# Altium PCB Tactility-pcb.PcbDoc
Units mm, origin at the board's own origin, x right, y up, seen from the top; angles counter-clockwise.
Board outline 100 x 40 mm, 2 copper layers (Top Layer, Bottom Layer), stack 1.581 mm thick; 18 components, 32 nets, 110 pads, 2 vias.
Unrouted connection lines stored in the file: 3.
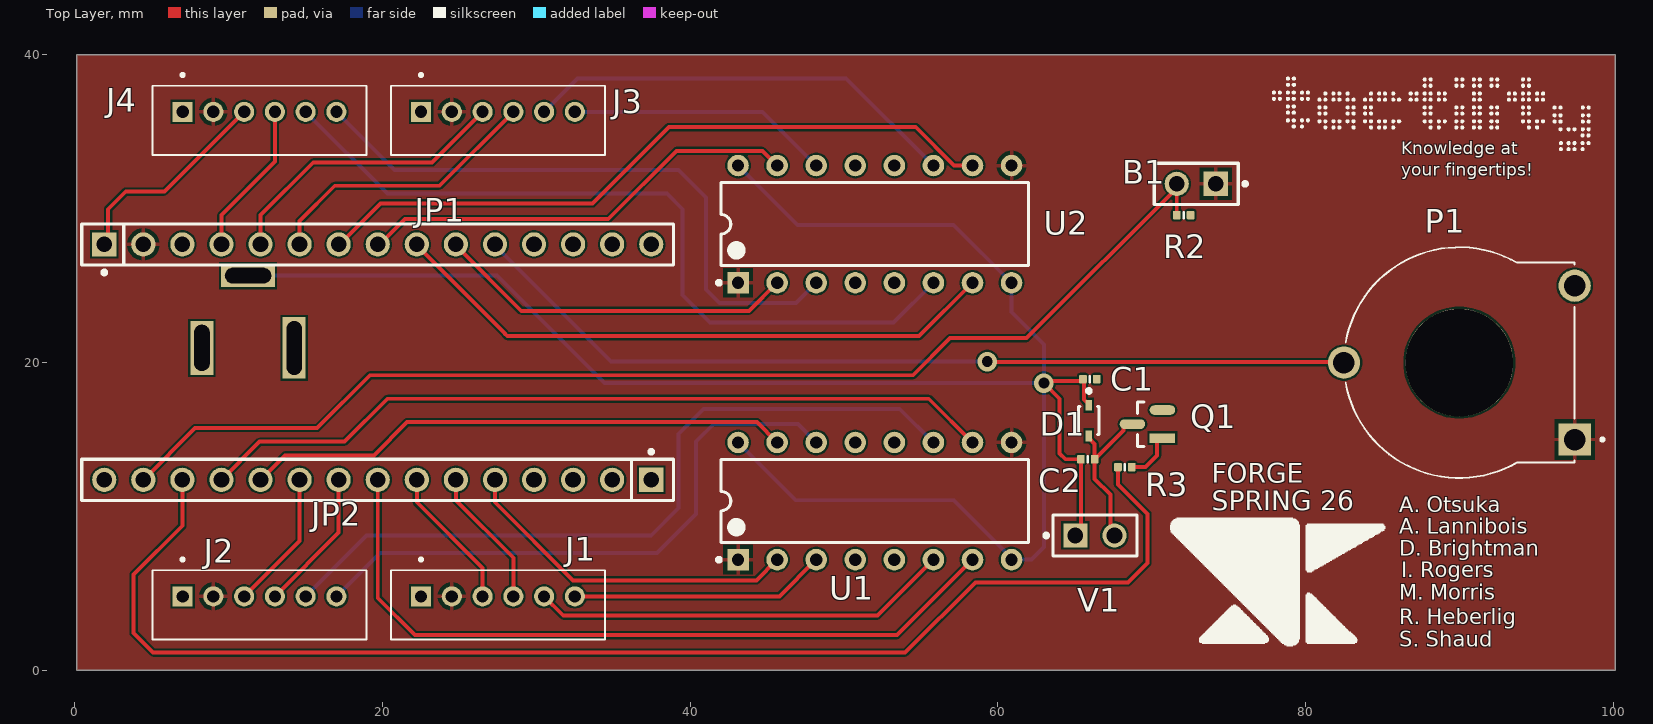
[diagram p0: Top Layer view]
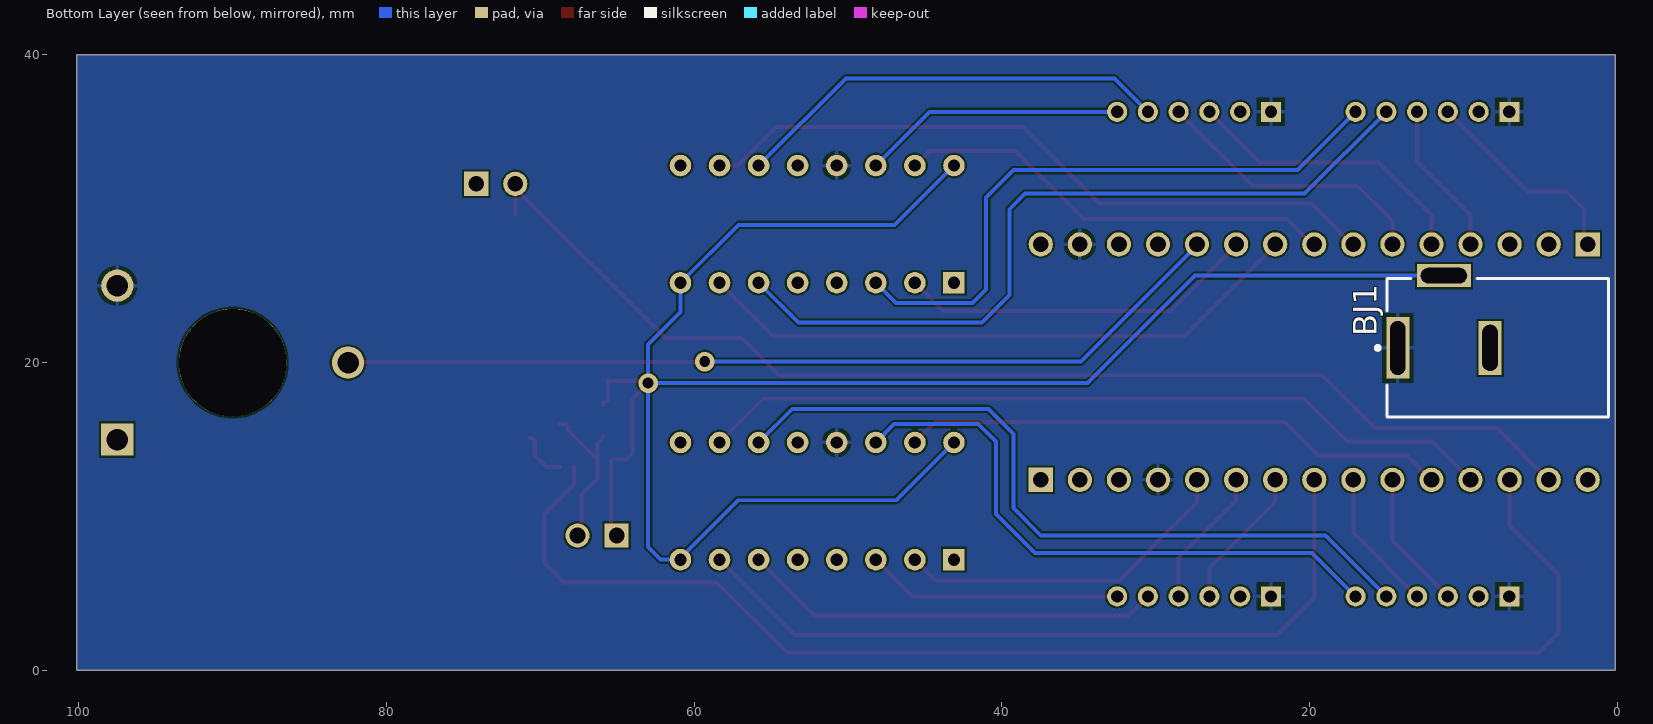
[diagram p1: Bottom Layer view, seen from below]
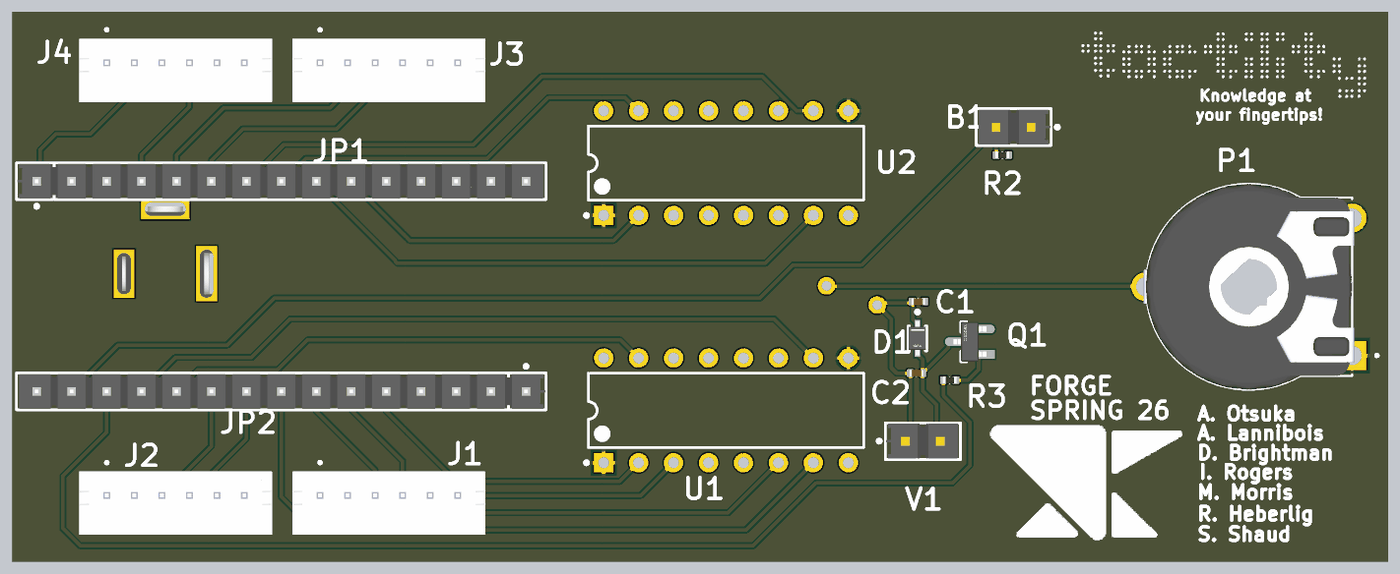
[diagram p2: 3D render of the assembled board from above, using the file's embedded part models]

## Layer stack, top to bottom
Top Solder: solder mask 0.0305, Solder Resist, Dk 3.8
Top Layer: signal copper 0.0356
Dielectric 1: dielectric 1.51, FR-4, Dk 4.6
Bottom Layer: signal copper 0.0356
Bottom Solder: solder mask 0.0305, Solder Resist, Dk 3.8

## Board outline
0.127,0 0.127,40 100.127,40 100.127,0

## Design rules (kind name [scope] priority, off if disabled: settings)
Clearance [All] p1: gap=0.127 ignorepadtopadclearanceinfootprint=FALSE
HoleSize [All] p1: absolutevalues=TRUE maxlimit=7 minlimit=0.025 maxpercent=80.000 minpercent=20.000
MinimumSolderMaskSliver [All] p1: minsoldermaskwidth=0.1
PolygonConnect [All] p1: connectstyle=Relief reliefconductorwidth=0.254 reliefentries=4 polygonreliefangle="90 Angle" airgapwidth=0.254
RoutingVias [All] p1: holewidth=0.3 width=0.6 viastyle="Through Hole" minholewidth=0.3 minwidth=0.6 maxholewidth=0.711 maxwidth=1.27
SilkToSolderMaskClearance [IsPad] p1: minsilkscreentomaskgap=0.1 clearancetoexposedcopper=TRUE
SolderMaskExpansion [All] p1: expansion=0.102 istentingtop=FALSE
SupplyNets "Schematic Supply Nets_2" [InNet('+12')] p1: voltage=0.000
SupplyNets "Schematic Supply Nets_3" [InNet('GND')] p2: voltage=0.000
SupplyNets "Schematic Supply Nets" [InNet('+3V3')] p3: voltage=0.000
Width [All] p1: maxlimit=0.254 minlimit=0.127 preferedwidth=0.254
27 further rules are at their usual default settings.

## Components (designator, comment, footprint, x,y, rotation, side; value= is the part's Value field where it differs from the comment)
B1 "TSW-102-07-F-S" FP-TSW-102-07-F-S-MFG 72.898,31.623 r180 top
BJ1 "PJ-002A" CUI-PJ-002A_V 11.255,20.955 r180 bottom
C1 "Capacitor 100nF +/-20% 10V 0402" CAPC0402(1005)60_L 65.982,18.923 r0 top value=100nF
C2 "Capacitor 100nF +/-20% 10V 0402" CAPC0402(1005)60_L 65.844,13.716 r180 top value=100nF
D1 "1N4148WSF-7" FP-SOD323F-MFG 65.913,16.235 r270 top value=1.5pF
J1 "B6B-PH-K-S" JST_B6B-PH-K-S 27.5,4.25 r180 top
J2 "B6B-PH-K-S" JST_B6B-PH-K-S 12,4.25 r180 top
J3 "B6B-PH-K-S" JST_B6B-PH-K-S 27.5,35.75 r180 top
J4 "B6B-PH-K-S" JST_B6B-PH-K-S 12,35.75 r180 top
JP1 "PINHD1X15" FP-TSW-115-23-T-S-MFG 19.685,27.686 r0 top
JP2 "PINHD1X15" FP-TSW-115-23-T-S-MFG 19.685,12.38 r180 top
P1 "PT15NV15-102A1010-S" TRIM_PT15NV15-102A1010-S 90,20 r90 top
Q1 "MMBT2222A-7-F" FP-SOT23-IPC_A 69.723,16.002 r180 top
R2 "10KR2F" RESC0402(1005)_L 72.078,29.591 r0 top value=5.6k
R3 "10KR2F" RESC0402(1005)_L 68.257,13.208 r0 top value=5.6k
U1 "L293D" STM-L293D-16 52,11 r90 top
U2 "L293D" STM-L293D-16 52,29 r90 top
V1 "TSW-102-07-F-S" FP-TSW-102-07-F-S-MFG 66.31,8.763 r0 top

## Footprints (in the part's own frame and the unit in brackets; to place one, negate y for a bottom-side part, rotate by r counter-clockwise, add the part's x,y. Pads: shape width x height; smd on the part's side, far side on the other; paste and mask are expansions set on the pad)
CAPC0402(1005)60_L [mm] "Chip Capacitor, Body 1.0x0.5mm, Height 0.6mm, IPC High Density"
  rrect25% 0.5x0.55 smd: 1(-0.45,0) 2(0.45,0)
  silkscreen extent 0,-0.2 0,0.2, body extent -0.5,-0.25 0.5,0.25, height 0.6
CUI-PJ-002A_V [mm] "THD, 3-Leads, Body 14.4x9mm, Height 11mm"
  rect 1.5x4 hole 1 slot 3.5 at 90 deg: 1(-3,0)
  rect 1.5x3.5 hole 1 slot 3 at 90 deg: 2(3,0)
  rect 3.5x1.5 hole 1 slot 3 at 0 deg: 3(0,4.7)
  silkscreen extent -4.43,-4.5 10.7,4.5, body extent -3.7,-4.5 10.7,4.9, height 11
FP-SOD323F-MFG [mm]
  rect 0.71x0.403 smd paste+0 mask+0: 1(-0.995,0) 2(0.995,0)
  silkscreen extent -2.05,-0.67 0.9,0.67, body extent -1.45,-0.77 1.45,0.77, height 0.25
FP-SOT23-IPC_A [mm]
  rect 1.659x0.627 smd paste+0 mask+0: 1(-0.977,0.915)
  rrect100% 1.659x0.627 smd paste+0 mask+0: 2(-0.977,-0.915) 3(0.977,0)
  silkscreen extent 0.23,-1.45 0.65,1.45, body extent -2.31,-1.95 2.31,1.95, height 0.25
FP-TSW-102-07-F-S-MFG [mm]
  rect 1.57x1.57 hole 1.02 paste-2539.97 mask+0: 1(-1.27,0)
  round 1.57 hole 1.02 paste-2539.97 mask+0: 2(1.27,0)
  silkscreen extent -3.3,-1.34 2.73,1.34, body extent -2.83,-1.44 2.83,1.44, height 0.25
FP-TSW-115-23-T-S-MFG [mm]
  rect 1.57x1.57 hole 1.02 paste-2539.97 mask+0: 1(-17.78,0)
  round 1.57 hole 1.02 paste-2539.97 mask+0: 2(-15.24,0) 3(-12.7,0) 4(-10.16,0) 5(-7.62,0) 6(-5.08,0) 7(-2.54,0) 8(0,0) 9(2.54,0) 10(5.08,0) 11(7.62,0) 12(10.16,0) 13(12.7,0) 14(15.24,0) 15(17.78,0)
  silkscreen extent -19.24,-1.95 19.24,1.34, body extent -19.34,-1.44 19.34,1.44, height 0.25
JST_B6B-PH-K-S [mm]
  rect 1.308x1.308 / inner round 1.308 / far side rect 1.308x1.308 hole 0.8: 1(5,-0.55)
  round 1.308 hole 0.8: 2(3,-0.55) 3(1,-0.55) 4(-1,-0.55) 5(-3,-0.55) 6(-5,-0.55)
  silkscreen extent -6.95,-3.05 6.95,2.25, body extent -6.95,-2.25 6.95,2.25, height 6
RESC0402(1005)_L [mm] "Chip Resistor, Body 1.0x0.5mm, IPC High Density"
  rrect25% 0.5x0.55 smd: 1(-0.45,0) 2(0.45,0)
  silkscreen extent 0,-0.2 0,0.2, body extent -0.5,-0.25 0.5,0.25, height 0.3
STM-L293D-16 [mm] "DIP, 16-Leads, Body 20x6.85mm, Pitch 2.54mm"
  rect 1.4x1.4 hole 0.8: 1(-3.81,8.89)
  round 1.4 hole 0.8: 2(-3.81,6.35) 3(-3.81,3.81) 4(-3.81,1.27) 5(-3.81,-1.27) 6(-3.81,-3.81) 7(-3.81,-6.35) 8(-3.81,-8.89) 9(3.81,-8.89) 10(3.81,-6.35) 11(3.81,-3.81) 12(3.81,-1.27) 13(3.81,1.27) 14(3.81,3.81) 15(3.81,6.35) 16(3.81,8.89)
  silkscreen extent -3.93,-10 2.7,10.26, body extent -3.93,-10 3.93,10, height 5.1
TRIM_PT15NV15-102A1010-S [mm]
  rect 2.1x2.1 / inner round 2.1 / far side rect 2.1x2.1 hole 1.4 mask+0.05: A(-5,-7.5)
  round 2.1 hole 1.4 mask+0.05: E(5,-7.5) S(0,7.5)
  round 7 hole 7 unplated: ""(0,0)
  silkscreen extent -7.5,-9.4 7.5,7.39, body extent -7.5,-7.65 7.5,7.65, height 7.2

## Part data
B1 V1: library part CMP-02766-001458-1, "CONN HEADER VERT 2POS 2.54MM", Color=Black, Flammability Rating="UL94 V-0", Max Current Rating=7.6A, Max Operating Temperature=125°C, Max Voltage Rating (AC)=550V, Min Operating Temperature=-55°C, Package Quantity=1, Connector Type=Header, Contact Finish - Mating=GOLD, Contact Material=Bronze, Contact Mating Length=0.23inch, Contact Plating=Gold, Contact Shape=Square, Contact Type="Male Pin", Depth=2.54mm, Fastening Type=Pull, Gender=Male, Housing Color=Black, Housing Material=Polyester, Insulation Color=Black, Insulation Material=PBT, Length=5.08mm, Mount="Through Hole", Number of Contacts=2, Number of Positions=2, Number of Rows=1, Orientation=Straight, Packaging=Bulk, Pitch=2.54mm, Radiation Hardening=No, REACH SVHC="No SVHC", RoHS Compliant=Yes, Series=TSW, Termination=Solder
BJ1: library part CMP-2000-06895-2, "Through Hole Right Angle DC Power Jack, 2.5 A, 2 mm Center Pin, 3 Position, -25 to 85 degC, RoHS, Bulk", Current Rating=2.5A, Flammability Rating=UL94V-0, Insulation Resistance=50MOhms, Manufacturer=CUIInc., Operating Temperature Range=-25Cto+85C, Package Description="3-Pin Through Hole Device, Body 14.4 x 9 mm, Height 11 mm", Voltage Rating=24V, Brand=CUI, Connector Type=DCPowerJack, Contact Gender=Male, Contact Material=Copper, Contact Plating=Nickel, Datasheet URL=http://www.cui.com/product/resource/pj-002a.pdf, Datasheet Version="Rev. 1.03, 04/2016", Factory Pack Quantity=500, Housing Material=PolybutyleneTerephthalate(PBT), Inside Contact Diameter=2mm, Manufacturer URL=http://www.cui.com/, Mounting Angle=Right, Mounting Style=ThroughHole, Mounting Technology=ThroughHole, Outside Contact Diameter=6.5mm, Package Reference=PJ-002A, Product=Jacks, Product Category=DCPowerConnectors, RoHS=True, Termination Style=ThroughHole
C1 C2: library part CMP-001-00061-3, "Chip Capacitor, 100nF +/-20%, 10V, 0402, Thickness 0.6 mm", Case/Package=0402, Max Operating Temperature=85°C, Min Operating Temperature=-55°C, Tolerance=20%, Voltage Rating=10V, Mounting Technology=SMT, Pins=2
D1: library part CMP-12791-000029-1, "DIODE GEN PURP 100V 250MA SOD323", Capacitance=1.5pF, Forward Current=250mA, Manufacturer="Diodes Inc.", Max Junction Temp=+150°C, Max Repetitive Reverse Voltage=100V, Max Surge Forward Current=0.5A, Package=SOD323F, Peak Reverse Current=0.5uA, Temperature="-55°C to +150°C", Temperature Range Low=-55°C, Automotive=No, Category=Diode, ComponentLink2Description=Datasheet, ComponentLink2URL=https://www.diodes.com/assets/Datasheets/1N4148WSF.pdf, Device Class L1="Discrete Semiconductors", Device Class L2=Diodes, Device Class L3="Rectifier Diodes", Digikey Description="DIODE GEN PURP 100V 250MA SOD323", Footprint Url=https://www.diodes.com/assets/Package-Files/SOD323F.pdf, Height=0.75mm, Lead Free=Yes, Manufacturer Part Number=1N4148WSF-7, Mouser Description="Diodes - General Purpose, Power, Switching 200mW 2pF 75Vrrm 150mA 2A 1VF", Octopart=https://octopart.com/1n4148wsf-7-diodes+inc.-33798544, Reverse Voltage=100V, RoHS=TRUE, Temperature Range High=+150°C
J1 J2 J3 J4: "Connector Header Through Hole 6 position 0.079 (2.00mm)", Package=None, Check_prices=https://www.snapeda.com/parts/B6B-PH-K-S/JST+Sales+America+Inc./view-part/?ref=eda, MF="JST Sales", MP=B6B-PH-K-S, SnapEDA_Link=https://www.snapeda.com/parts/B6B-PH-K-S/JST+Sales+America+Inc./view-part/?ref=snap
JP1 JP2: library part CMP-00005-8, "15 header unit", Color=Black, Current Rating=5.7A, Manufacturer Lifecycle Status=PRODUCTION, Max Operating Temperature=105°C, Min Operating Temperature=-55°C, Voltage Rating=550V, Connector Type="Male Pin", Contact Material="Nickel, Tin", Contact Mating Length=5.842mm, Contact Plating=Tin, Gender=Male, Height=8.64mm, Housing Color=Black, Housing Material=Plastic, Lead Free="Lead Free", Lead Pitch=2.54mm, Length=38.1mm, Lifecycle Status=Production, Mounting Technology="Through Hole", Number of Contacts=15, Number of Positions=15, Number of Rows=1, Packaging=Bulk, Pitch=2.54mm, Radiation Hardening=No, REACH SVHC=No, RoHS=Compliant, Termination=Solder, Width=2.54mm
P1: "1 kOhms 0.25W, 1/4W PC Pins Through Hole Trimmer Potentiometer Carbon 1.0 Turn Top Adjustment", Package=None, Availability="In Stock", Check_prices=https://www.snapeda.com/parts/PT15NV15-102A1010-S/Piher/view-part/?ref=eda, MF="Amphenol Piher Sensing Systems", MP=PT15NV15-102A1010-S, Price=None, Purchase-URL=https://pricing.snapeda.com/search/part/PT15NV15-102A1010-S/?ref=eda, SnapEDA_Link=https://www.snapeda.com/parts/PT15NV15-102A1010-S/Piher/view-part/?ref=snap
Q1: library part CMP-1693-00003-4, "TRANS NPN 40V 0.6A SMD SOT23-3", Case/Package=SOT-23, Collector Base Voltage (VCBO)=75V, Collector Emitter Breakdown Voltage=40V, Collector Emitter Saturation Voltage=1V, Continuous Collector Current=600mA, Current=1A, Emitter Base Voltage (VEBO)=6V, Frequency=300MHz, Max Operating Temperature=150°C, Max Power Dissipation=300mW, Min Operating Temperature=-55°C, Package Quantity=3000, Power Dissipation=350mW, Collector Emitter Voltage (VCEO)=40V, Contact Plating=Tin, Current Rating=600mA, Element Configuration=Single, Gain Bandwidth Product=300MHz, Height=1mm, hFE Min=100, Lead Free="Lead Free", Length=3.05mm, Max Breakdown Voltage=40V, Max Collector Current=600mA, Max Frequency=300MHz, Mount="Surface Mount", Number of Elements=1, Number of Pins=3, Packaging="Tape and Reel", Polarity=NPN, Radiation Hardening=No, REACH SVHC="No SVHC", Termination=SMD/SMT, Transition Frequency=300MHz, Voltage=40V, Voltage Rating (DC)=40V, Weight=0.000282oz, Width=1.4mm
R2 R3: library part CMP-009-00066-2, "10K 0.063W 1% 0402 (1005 Metric)  SMD", Case/Package=0402, Power=63mW, Tolerance=1%, Mounting Technology=SMT, Pins=2
U1 U2: library part CMP-2000-06524-1, "Push-Pull Four Channel Driver with Diode, 4.5 to 36 V, -40 to 150 degC, 16-Pin PDIP, RoHS, Tube", Current - Output / Channel=600mA, Current - Peak Output=1.2A, Manufacturer=STMicroelectronics, On-State Resistance=-, Operating Temperature=-40°C~150°C, Package / Case="16-DIP(0.300\",7.62mm)", Package Description="16-Pin Thru-Hole Dual-In-Line, Body 20 x 6.85 mm, Pitch 2.54 mm", Package Reference=DIP-16, Standard Package=25, Supplier Device Package=16-PowerDIP, Voltage - Supply=4.5V~36V, Category=IntegratedCircuits(ICs), Datasheet URL=http://www.st.com/st-web-ui/static/active/en/resource/technical/document/datasheet/CD00000059.pdf, Datasheet Version=07/2003, Dynamic Catalog=HalfBridge, Family=PMIC-MOSFET,BridgeDrivers-InternalSwitch, Input Type=Non-Inverting, Manufacturer URL=http://www.st.com/, Mounting Technology=ThroughHole, Mounting Type=ThroughHole, Number of Outputs=4, Other Names=497-2936-5, Other Related Documents=L293DViewAllSpecifications, Packaging=Tube, PartNumber=L293D, Series=-, Type=HalfBridge

## Via types
v1: diameter 1.27, hole 0.711, Top Layer to Bottom Layer, 2 vias

## Nets (pads, with @x,y where several pads share a name; then routed paths per layer and width w, separated by ;. In a path a pad name is that pad's centre, name@x,y a point inside that pad or via, vN(x,y) a via of type N, cw(c..) or ccw(c..) an arc to the next point about the centre after c; other vN are vias at no path point)
+3V3: B1.1 J1.2 J2.2 J3.2 J4.2 JP1.2 P1.A U1.1 U1.9 U2.1 U2.9
+12: BJ1.3 C1.1 C2.2 D1.1 U1.8 U1.16 U2.8 U2.16 V1.1 | length 133.1
  Top Layer w0.254: V1.1@65.31,8.763 65.394,8.847 C2.2 64.389,13.716 64.008,14.097 64.008,17.653 v1(62.992,18.669) 63.14,18.817 65.426,18.817 C1.1 65.59,18.865 65.59,17.607 65.739,17.458 65.838,17.458 65.913,17.383 D1.1
  Bottom Layer w0.254: BJ1.3 27.431,25.655 34.417,18.669 v1(62.992,18.669) ; U1.16 46.871,11.049 57.15,11.049 60.89,7.309 U1.8 62.181,7.19 62.992,8.001 v1(62.992,18.669) ; U2.16 46.964,28.956 57.124,28.956 U2.8 60.89,23.286 62.992,21.184 v1(62.992,18.669)
A0: J4.4 JP1.4 | length 10.1
  Top Layer w0.254: JP1.4@9.525,27.62 9.525,29.591 13,33.066 J4.4
A1: J3.3 JP1.5 | length 19.2
  Top Layer w0.254: JP1.5@12.065,27.62 12.065,29.591 15.494,33.02 23.22,33.02 J3.3
A2: J3.4 JP1.6 | length 18.4
  Top Layer w0.254: JP1.6@14.605,27.62 14.605,29.21 16.891,31.496 23.696,31.496 J3.4
A3: JP1.7 U2.10 | length 45.4
  Top Layer w0.254: JP1.7@17.145,27.62 19.878,30.353 33.655,30.353 38.608,35.306 54.663,35.306 57.159,32.81 U2.10
A4: JP1.8 U2.15 | length 28.9
  Top Layer w0.254: JP1.8@19.685,27.62 19.746,27.62 21.463,29.337 34.671,29.337 39.098,33.764 44.696,33.764 U2.15
A5: JP1.9 U2.7 | length 40
  Top Layer w0.254: JP1.9@22.225,27.62 27.962,21.883 27.962,21.866 28.111,21.717 54.877,21.717 U2.7
A6: JP1.10 U2.2 | length 23.4
  Top Layer w0.254: JP1.10@24.765,27.62 29.017,23.368 43.828,23.368 U2.2
A7: JP1.11 P1.S | length 58.4
  Top Layer w0.254: v1(59.309,20.066) 59.342,20.033 82.467,20.033 P1.S
  Bottom Layer w0.254: JP1.11@27.305,27.62 34.859,20.066 v1(59.309,20.066)
D2: JP2.5 U1.2 | length 22.9
  Top Layer w0.254: JP2.5 27.305,10.922 32.385,5.842 44.302,5.842 U1.2 U1.2@45.948,7.488
D3: J1.4 JP2.6 | length 9.1
  Top Layer w0.254: JP2.6 24.765,11.049 28.5,7.314 J1.4
D4: J1.3 JP2.7 | length 9.4
  Top Layer w0.254: JP2.7 22.225,10.922 26.5,6.647 J1.3
D5: JP2.8 U1.7 | length 49.4
  Top Layer w0.254: JP2.8 19.685,4.699 22.098,2.286 53.446,2.286 U1.7
D6: J2.4 JP2.9 | length 9.3
  Top Layer w0.254: J2.4 17.145,8.945 JP2.9
D7: J2.3 JP2.10 | length 9.1
  Top Layer w0.254: J2.3 14.605,8.405 JP2.10
D8: JP2.11 U1.15 | length 35.7
  Top Layer w0.254: JP2.11 13.655,13.97 19.431,13.97 21.59,16.129 44.331,16.129 U1.15
D9: JP2.12 U1.10 | length 52.2
  Top Layer w0.254: JP2.12 12.004,14.859 17.526,14.859 20.32,17.653 55.507,17.653 U1.10
D10: JP2.13 R3.1 | length 87.2
  Top Layer w0.254: JP2.13 6.985,9.397 3.81,6.222 3.81,2.413 5.08,1.143 53.975,1.143 58.547,5.715 68.453,5.715 69.723,6.985 69.723,10.16 67.807,12.076 R3.1
D11: B1.2 JP2.14 R2.1 | length 77.5
  Top Layer w0.254: JP2.14 7.813,15.748 15.748,15.748 19.177,19.177 54.483,19.177 56.896,21.59 61.865,21.59 B1.2@71.898,31.623 ; R2.1 B1.2
D13: J4.3 JP1.1 | length 13.9
  Top Layer w0.254: JP1.1@1.905,27.62 2.159,27.874 2.159,29.972 3.302,31.115 5.815,31.115 J4.3
GND: BJ1.1 C1.2 J1.1 J2.1 J3.1 J4.1 JP1.14 JP2.4 P1.E Q1.2 R2.2 U1.13 U2.13
NetC2_1: C2.1 D1.2 Q1.3 V1.2 | length 10.6
  Top Layer w0.254: D1.2 65.913,15.087 66.294,14.706 C2.1 66.294,12.446 67.31,11.43 V1.2@67.31,8.763 ; C2.1@66.294,13.741 66.417,13.864 66.442,13.864 68.155,15.577 68.155,15.825 68.331,16.002 Q1.3
NetQ1_1: Q1.1 R3.2 | length 3.3
  Top Layer w0.254: R3.2 69.596,13.208 70.358,13.97 70.358,14.901 70.544,15.087 Q1.1
OUT1A: J1.6 U1.3 | length 16.7
  Top Layer w0.254: J1.6 45.8,4.8 U1.3
OUT1B: J3.6 U2.14 | length 17.1
  Bottom Layer w0.254: J3.6 44.7,36.3 U2.14
OUT2A: J1.5 U1.6 | length 27.3
  Top Layer w0.254: J1.5 31.744,3.556 52.176,3.556 U1.6
OUT2B: J3.5 U2.11 | length 28.6
  Bottom Layer w0.254: J3.5 32.681,38.481 50.139,38.481 U2.11
OUT3A: J2.5 U1.11 | length 49.6
  Bottom Layer w0.254: J2.5 18.963,8.763 37.465,8.763 39.243,10.541 39.243,15.367 40.872,16.996 53.624,16.996 U1.11
OUT3B: J4.6 U2.3 | length 40.4
  Bottom Layer w0.254: J4.6 20.788,32.512 39.243,32.512 41.021,30.734 41.021,24.765 41.91,23.876 46.876,23.876 U2.3
OUT4A: J2.6 U1.14 | length 39.1
  Bottom Layer w0.254: J2.6 19.82,7.62 37.846,7.62 40.386,10.16 40.386,14.859 41.529,16.002 46.998,16.002 U1.14
OUT4B: J4.5 U2.6 | length 50.8
  Bottom Layer w0.254: J4.5 20.312,30.988 38.481,30.988 39.497,29.972 39.497,24.384 41.275,22.606 53.226,22.606 U2.6
pads on no net: BJ1.2 JP1.3 JP1.12 JP1.13 JP1.15 JP2.1 JP2.2 JP2.3 JP2.15 P1. U1.4 U1.5 U1.12 U2.4 U2.5 U2.12

## Polygon pours and split planes (outlines as drawn)
+3V3 on Top Layer "+3V3_L01_P000" (solid, pour order 0): 0.127,0 0.254,0 100.127,0 100.127,40.005 0.127,40.005
GND on Bottom Layer "GND_L02_P002" (solid, pour order 2): 0.127,0 100.127,0 100.127,40.005 0.127,40.005

## Silkscreen, mask and mechanical layers (free items; w line width, h text height)
Top Overlay:
  drawing of 202 lines, arcs and shapes, not listed
  text "Knowledge at" at 86.233,33.541 h0.8
  text "your fingertips!" at 86.233,32.144 h0.8
  text "FORGE" at 73.914,12.192 h1.25
  text "SPRING 26" at 73.914,10.414 h1.25
  text "A. Otsuka" at 86.106,10.287 h1
  text "A. Lannibois" at 86.106,8.89 h1
  text "D. Brightman" at 86.106,7.445 h1
  text "I. Rogers" at 86.233,6.048 h1
  text "M. Morris" at 86.106,4.572 h1
  text "R. Heberlig" at 86.106,3 h1
  text "S. Shaud" at 86.106,1.524 h1